# Altium PCB PCB1.PcbDoc (part 1 of 4)
Units mil, origin at the board's own origin, x right, y up, seen from the top; angles counter-clockwise.
Board outline 5315 x 3730 mil, 2 copper layers (Top Layer, Bottom Layer); 713 components, 554 nets, 2458 pads, 0 vias.
Unrouted connection lines stored in the file: 1728.
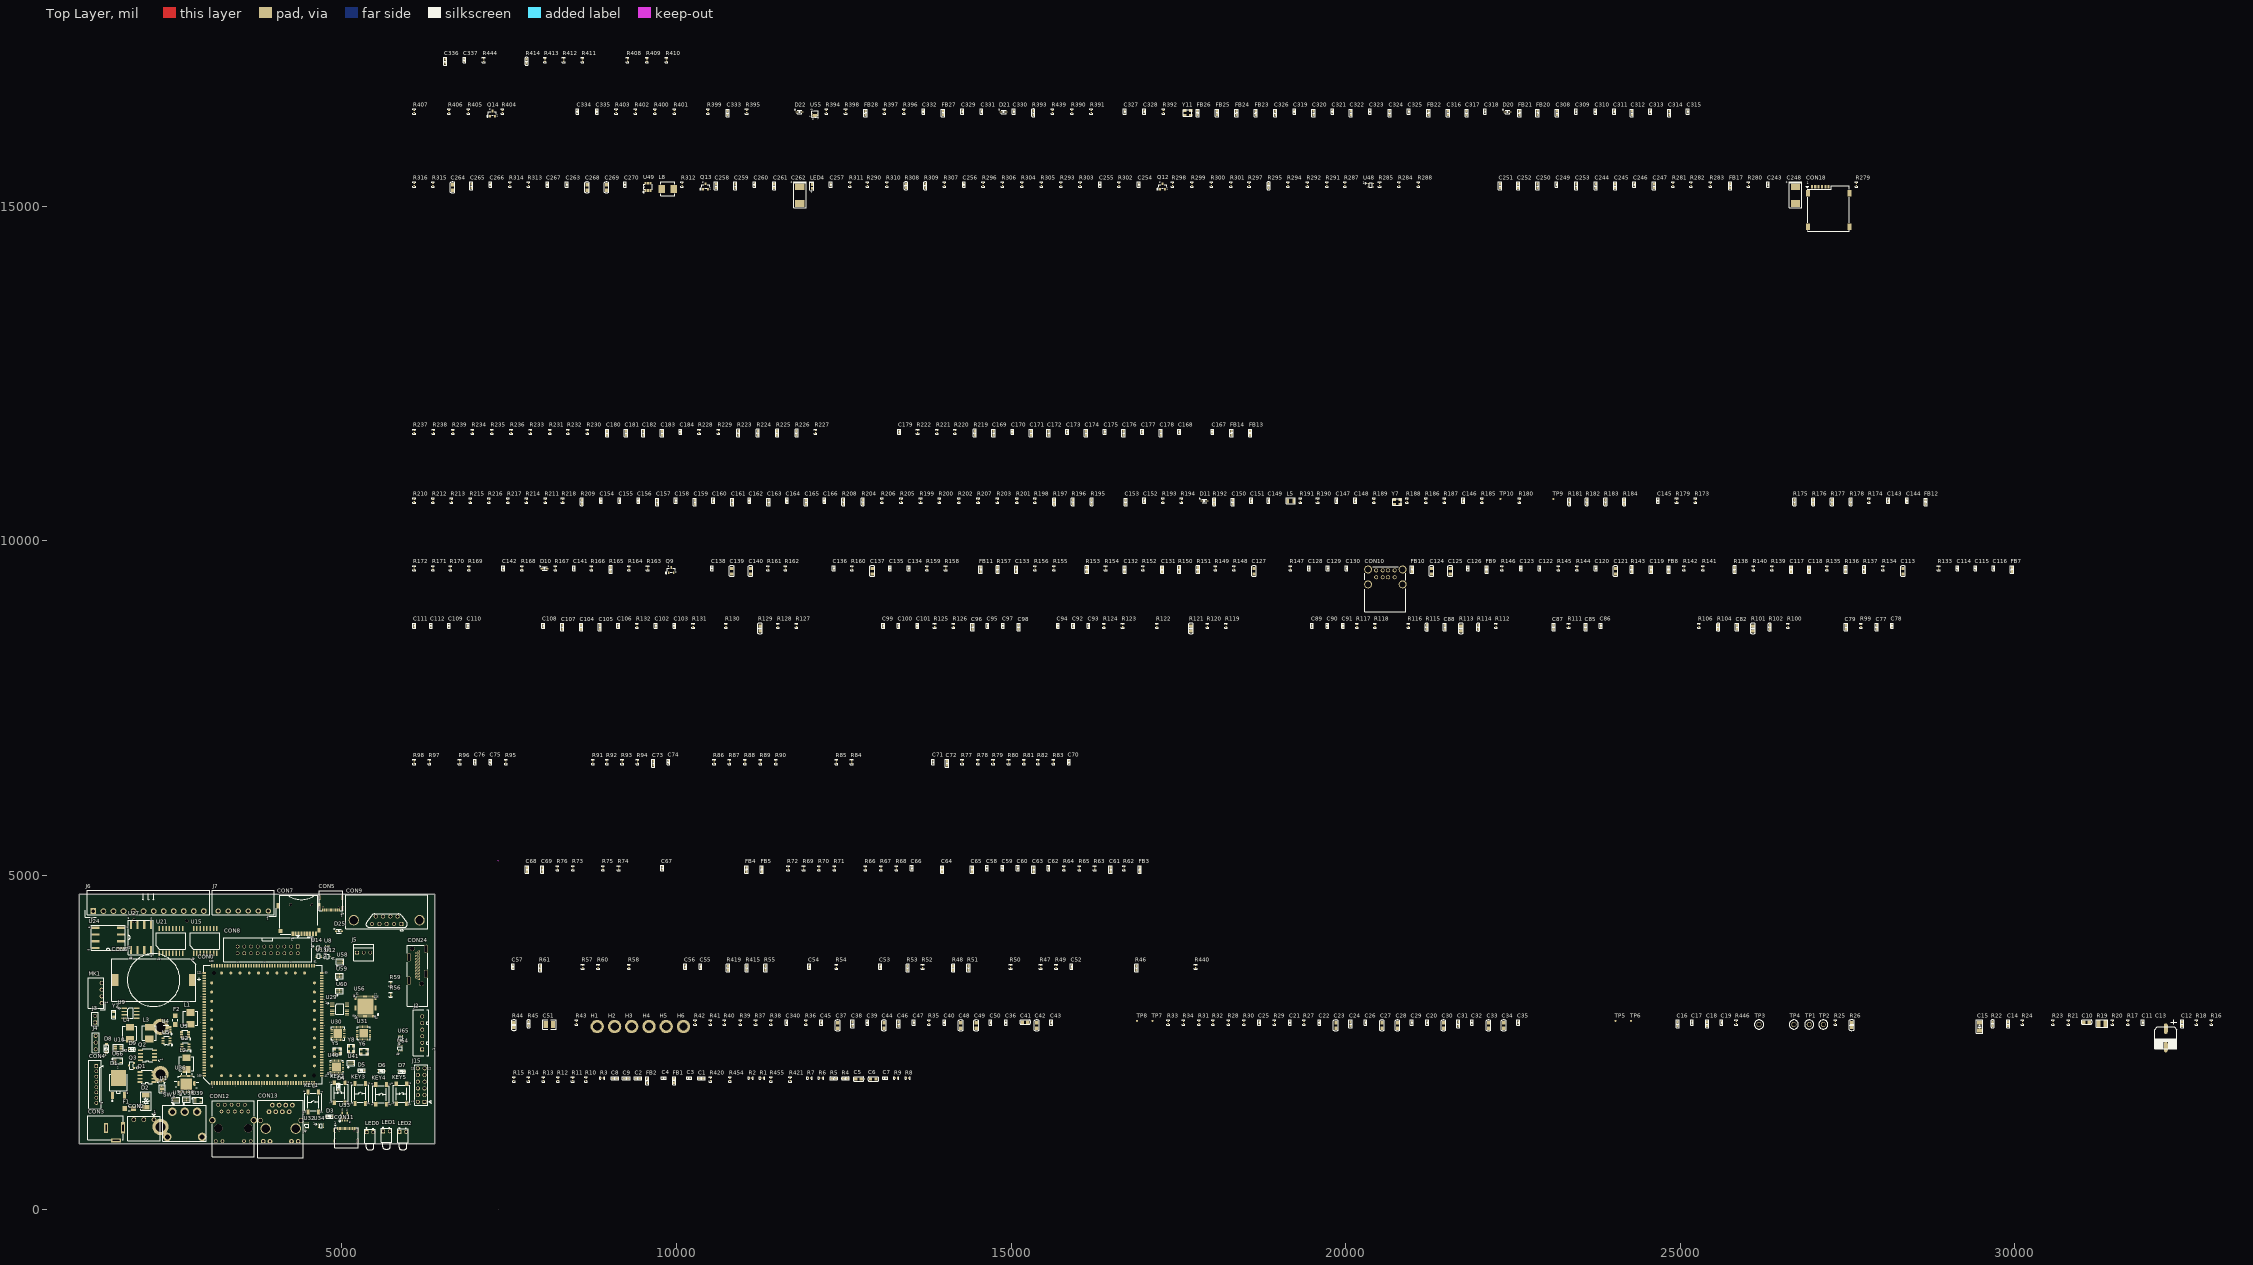
[diagram p0: Top Layer view]
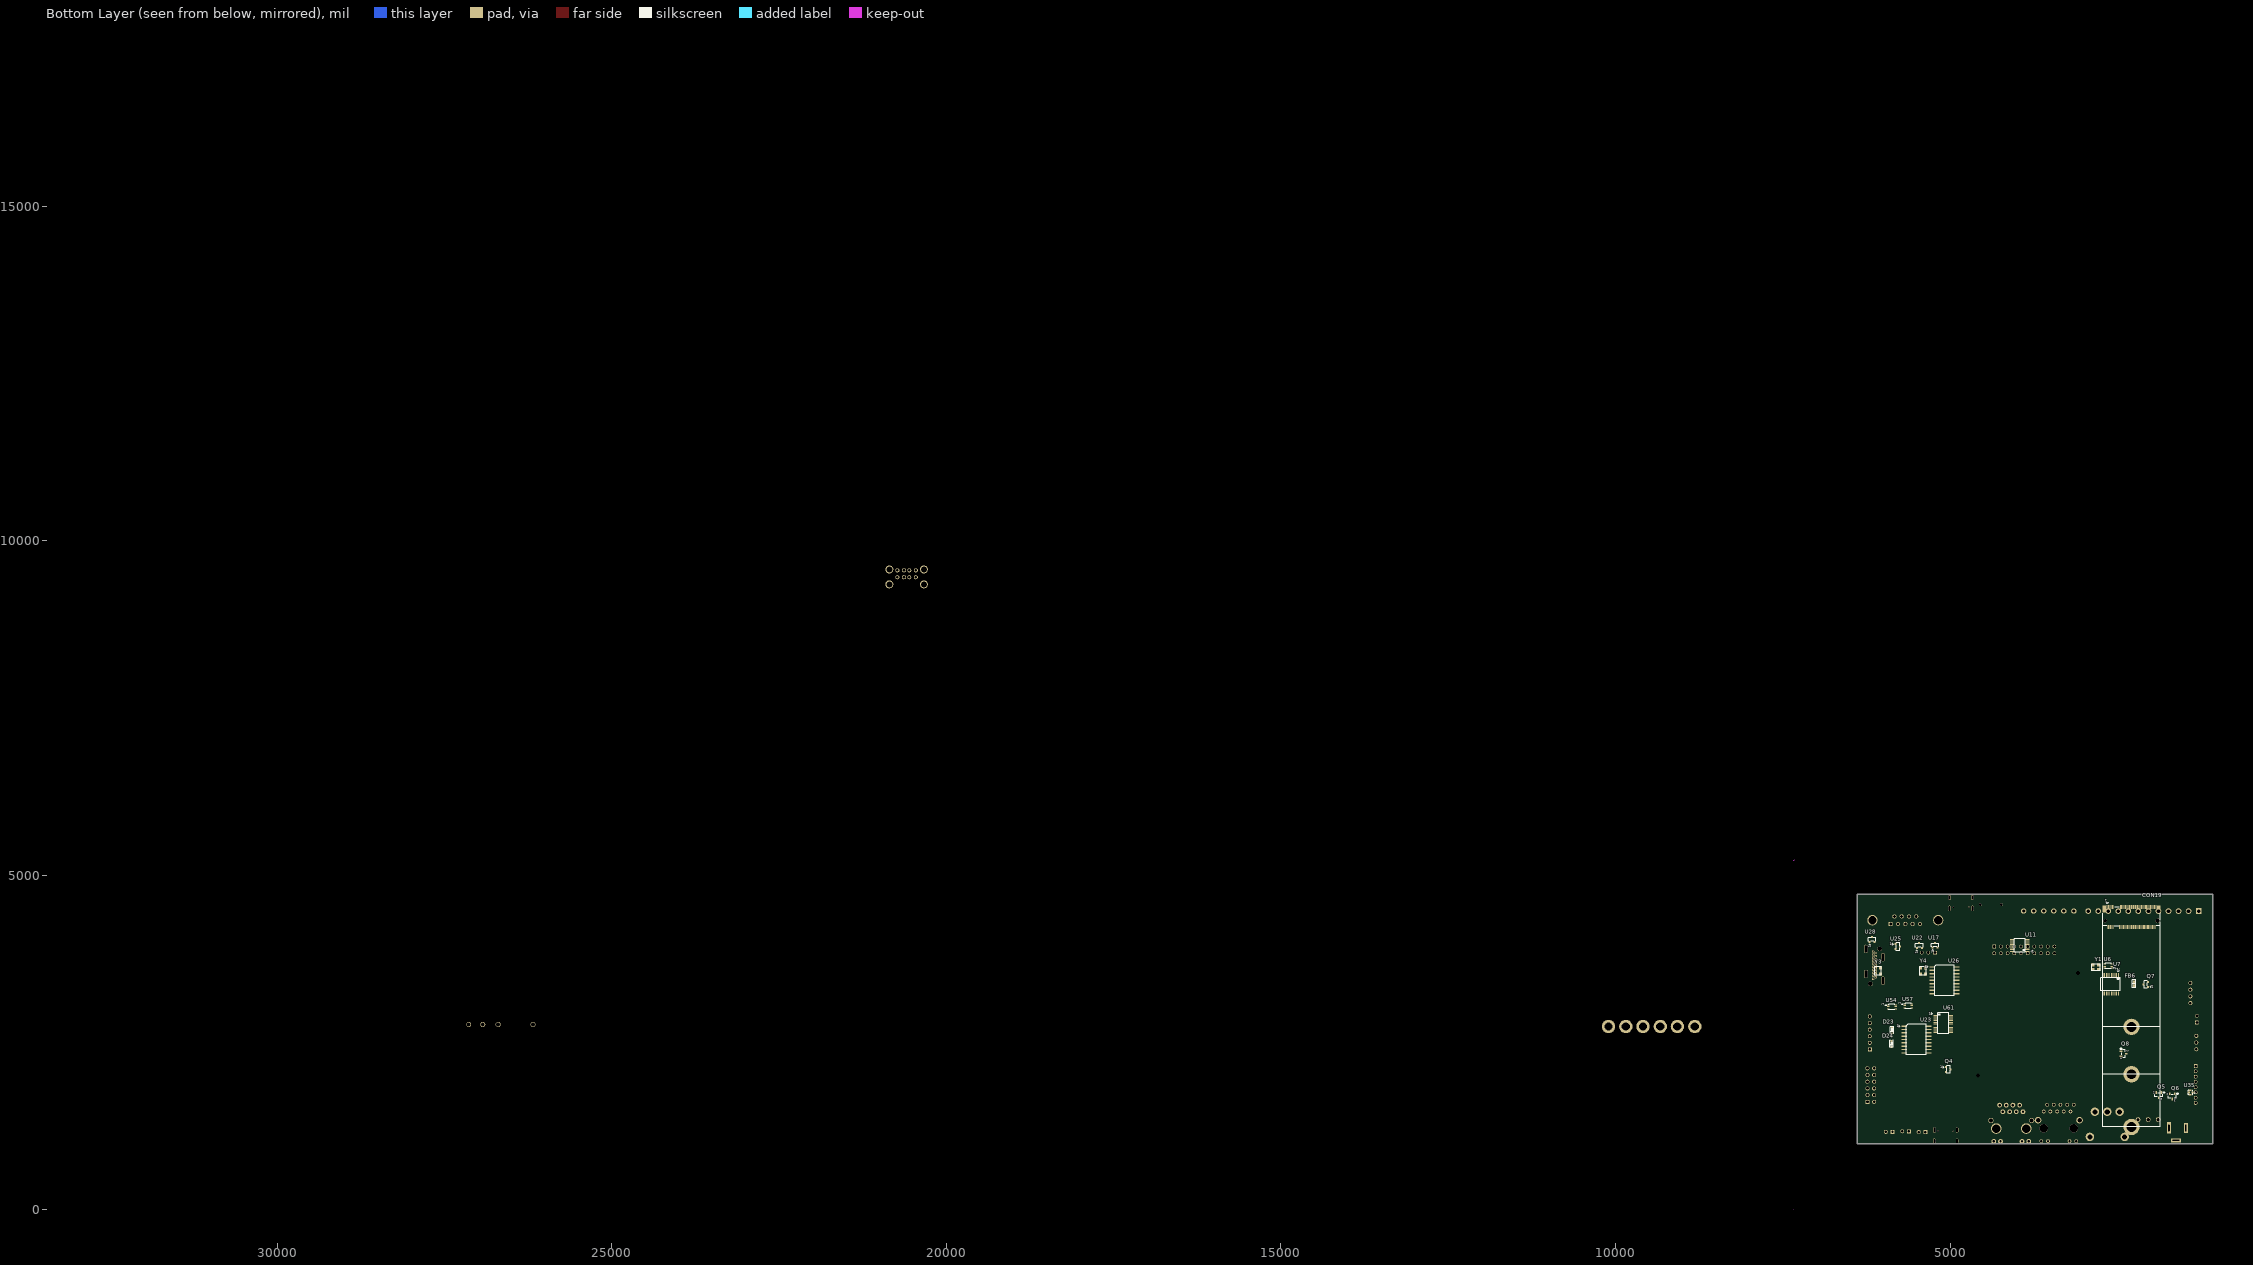
[diagram p1: Bottom Layer view, seen from below]

## Layer stack, top to bottom
Top Solder: solder mask 0.4, Solder Resist, Dk 3.5
Top Layer: signal copper 1.4
Dielectric 1: dielectric 12.6, FR-4, Dk 4.8
Bottom Layer: signal copper 1.4
Bottom Solder: solder mask 0.4, Solder Resist, Dk 3.5

## Board outline
1075,990 6390,990 6390,4720 1075,4720

## Design rules (kind name [scope] priority, off if disabled: settings)
AssemblyTestPointUsage [All] p1 off:
AssemblyTestpoint [All] p1 off: testpointundercomponent=TRUE minsize=40 maxsize=100 preferedsize=60 minholesize=0 maxholesize=40 preferedholesize=32 testpointgrid=1 usegrid=TRUE gridtolerance=0.01 allowsidetop=TRUE allowsidebottom=TRUE
Clearance [All] p1 off: gap=10 ignorepadtopadclearanceinfootprint=FALSE
ComponentClearance [All] p1 off: gap=10 collisioncheckmode=3 verticalgap=10 showdistances=FALSE
DiffPairsRouting [All] p1 off: maxlimit=10 minlimit=10 mostfreqgap=10 toplayer_minwidth=15 toplayer_maxwidth=15 toplayer_prefwidth=15 bottomlayer_minwidth=15 bottomlayer_maxwidth=15 bottomlayer_prefwidth=15 maxuncoupledlength=500
FabricationTestPointUsage [All] p1 off: valid=0 allowmultiple=FALSE
FabricationTestpoint [All] p1 off: side=3 testpointundercomponent=TRUE minsize=40 maxsize=100 preferedsize=60 minholesize=0 maxholesize=40 preferedholesize=32 testpointgrid=1 allowsidetop=TRUE allowsidebottom=TRUE usegrid=TRUE gridtolerance=0.01
FanoutControl Fanout_BGA [IsBGA] p1 off: bgadir=Out bgaviamode=Centered fanoutstyle=Auto fanoutdirection=Alternating viagrid=1 // Fanout_BGA (Default Rule)
FanoutControl Fanout_LCC [IsLCC] p2 off: bgadir=Out bgaviamode=Centered fanoutstyle=Auto fanoutdirection=Alternating viagrid=1 // Fanout_LCC (Default Rule)
FanoutControl Fanout_SOIC [IsSOIC] p3 off: bgadir=Out bgaviamode=Centered fanoutstyle=Auto fanoutdirection=Alternating viagrid=1 // Fanout_SOIC (Default Rule)
FanoutControl Fanout_Small [(CompPinCount < 5)] p4 off: bgadir=Out bgaviamode=Centered fanoutstyle=Auto fanoutdirection=OutThenIn viagrid=1 // Fanout_Small (Default Rule)
FanoutControl Fanout_Default [All] p5 off: bgadir=Out bgaviamode=Centered fanoutstyle=Auto fanoutdirection=Alternating viagrid=1 // Fanout_Default (Default Rule)
Height [All] p1 off: minheight=0 maxheight=1000 prefheight=500
HoleSize [All] p1 off: absolutevalues=TRUE maxlimit=100 minlimit=1 maxpercent=80.000 minpercent=20.000
HoleToHoleClearance [All] p1 off: gap=10 allowstackedmicrovias=TRUE
LayerPairs [All] p1 off: enforce=TRUE
MinimumSolderMaskSliver [All] p1 off: minsoldermaskwidth=10
NetAntennae [All] p1 off: netantennaetolerance=0
PasteMaskExpansion [All] p1 off: expansion=0
PlaneClearance [All] p1 off: clearance=20
PlaneConnect [All] p1 off: planeconnectstyle=Relief reliefexpansion=20 reliefentries=4 reliefconductorwidth=10 reliefairgap=10
PolygonConnect [All] p1 off: connectstyle=Relief reliefconductorwidth=10 reliefentries=4 polygonreliefangle="90 Angle" airgapwidth=10
RoomDefinition "P20_WIFI&BT_SDIO_IO EXPANDERS" [InComponentClass('P20_WIFI&BT_SDIO_IO EXPANDERS')] p1 off: confinementstyle=ConfineIn formatcopy=TRUE lockcomponents=FALSE outline 6050,16615 10065,16615 10065,17335 6050,17335
RoomDefinition "P19_HDMI OUT" [InComponentClass('P19_HDMI OUT')] p2 off: confinementstyle=ConfineIn formatcopy=TRUE lockcomponents=FALSE outline 6050,15525 25330,15525 25330,16565 6050,16565
RoomDefinition P15_4G_5G_NVME [InComponentClass('P15_4G_5G_NVME')] p3 off: confinementstyle=ConfineIn formatcopy=TRUE lockcomponents=FALSE outline 6050,11830 27860,11830 27860,15475 6050,15475
RoomDefinition "P11_ETH1 RMII" [InComponentClass('P11_ETH1 RMII')] p4 off: confinementstyle=ConfineIn formatcopy=TRUE lockcomponents=FALSE outline 6050,10800 19090,10800 19090,11780 6050,11780
RoomDefinition "P10_ETH0 RGMII" [InComponentClass('P10_ETH0 RGMII')] p5 off: confinementstyle=ConfineIn formatcopy=TRUE lockcomponents=FALSE outline 6050,9790 28880,9790 28880,10750 6050,10750
RoomDefinition "P09_USB HOST_USB OTG" [InComponentClass('P09_USB HOST_USB OTG')] p6 off: confinementstyle=ConfineIn formatcopy=TRUE lockcomponents=FALSE outline 6050,8930 30120,8930 30120,9740 6050,9740
RoomDefinition P08_RS485_RS232_CAN [InComponentClass('P08_RS485_RS232_CAN')] p7 off: confinementstyle=ConfineIn formatcopy=TRUE lockcomponents=FALSE outline 6065.5,6924.7 28345.5,6924.7 28345.5,8909.7 6065.5,8909.7
RoomDefinition "P07_MICRO SD_FAN_ARM JTAG" [InComponentClass('P07_MICRO SD_FAN_ARM JTAG')] p8 off: confinementstyle=ConfineIn formatcopy=TRUE lockcomponents=FALSE outline 6032.19,5402.61 16012.19,5402.61 16012.19,6857.61 6032.19,6857.61
RoomDefinition "P06_DEBUG UART_RTC_WD" [InComponentClass('P06_DEBUG UART_RTC_WD')] p9 off: confinementstyle=ConfineIn formatcopy=TRUE lockcomponents=FALSE outline 7556.25,3801.35 18031.25,3801.35 18031.25,5256.35 7556.25,5256.35
RoomDefinition "P05_BOOT SET_KEY_LED_SPI_ADC" [InComponentClass('P05_BOOT SET_KEY_LED_SPI_ADC')] p10 off: confinementstyle=ConfineIn formatcopy=TRUE lockcomponents=FALSE outline 7525,2974.7 17985,2974.7 17985,3784.7 7525,3784.7
RoomDefinition P04_POWER [InComponentClass('P04_POWER')] p11 off: confinementstyle=ConfineIn formatcopy=TRUE lockcomponents=FALSE outline 7524.99,2110 34764.99,2110 34764.99,2950 7524.99,2950
RoomDefinition "P03_SOM CONNECTOR" [InComponentClass('P03_SOM CONNECTOR')] p12 off: confinementstyle=ConfineIn formatcopy=TRUE lockcomponents=FALSE outline 7540,79.7 15550,79.7 15550,2099.7 7540,2099.7
RoutingCorners [All] p1 off: cornerstyle=45-Degree minsetback=100 maxsetback=100
RoutingLayers [All] p1 off: top layer_v5=TRUE bottom layer_v5=TRUE
RoutingPriority [All] p1 off: routingpriority=0
RoutingTopology [All] p1 off: topology=Shortest
RoutingVias [All] p1 off: holewidth=28 width=50 viastyle="Through Hole" minholewidth=28 minwidth=50 maxholewidth=28 maxwidth=50
ShortCircuit [All] p1 off: allowed=FALSE
SilkToSilkClearance [All] p1 off: silktosilkclearance=10
SilkToSolderMaskClearance [IsPad] p1 off: minsilkscreentomaskgap=10 clearancetoexposedcopper=TRUE
SolderMaskExpansion [All] p1 off: expansion=4 istentingtop=FALSE
SupplyNets "Schematic Supply Nets_34" [InNet('VFFE_VIO_1V8')] p1 off: voltage=0.000
SupplyNets "Schematic Supply Nets_33" [InNet('AVDD_3V3_ETH1')] p2 off: voltage=0.000
SupplyNets "Schematic Supply Nets_32" [InNet('VDD_3V3_ACODEC')] p3 off: voltage=0.000
SupplyNets "Schematic Supply Nets_31" [InNet('VDD_3V3_SOM_OUT')] p4 off: voltage=0.000
SupplyNets "Schematic Supply Nets_30" [InNet('VCCA_1V8_SYSCLK')] p5 off: voltage=0.000
SupplyNets "Schematic Supply Nets_29" [InNet('VCCA_1V8_LVDSTX')] p6 off: voltage=0.000
SupplyNets "Schematic Supply Nets_28" [InNet('VDD_1V2_A0L')] p7 off: voltage=0.000
SupplyNets "Schematic Supply Nets_27" [InNet('VDD_1V2_L0L')] p8 off: voltage=0.000
SupplyNets "Schematic Supply Nets_26" [InNet('EGND')] p9 off: voltage=0.000
SupplyNets "Schematic Supply Nets_25" [InNet('VDD_3V3_ETH1')] p10 off: voltage=0.000
SupplyNets "Schematic Supply Nets_24" [InNet('GND')] p11 off: voltage=0.000
SupplyNets "Schematic Supply Nets_23" [InNet('VDD_3V3_JTAG')] p12 off: voltage=0.000
SupplyNets "Schematic Supply Nets_22" [InNet('VDD_1V2_ETH0L')] p13 off: voltage=0.000
SupplyNets "Schematic Supply Nets_21" [InNet('VDD_1V8_SIM')] p14 off: voltage=0.000
SupplyNets "Schematic Supply Nets_20" [InNet('VCCA_1V8_MIPIRX')] p15 off: voltage=0.000
SupplyNets "Schematic Supply Nets_19" [InNet('VDD_3V3_ETH0')] p16 off: voltage=0.000
SupplyNets "Schematic Supply Nets_18" [InNet('VDD_3V3_SOM')] p17 off: voltage=0.000
SupplyNets "Schematic Supply Nets_17" [InNet('VDD_1V8')] p18 off: voltage=0.000
SupplyNets "Schematic Supply Nets_16" [InNet('VDD_5V_HUB')] p19 off: voltage=0.000
SupplyNets "Schematic Supply Nets_15" [InNet('VDD_12V_IN')] p20 off: voltage=0.000
SupplyNets "Schematic Supply Nets_14" [InNet('VCCA_1V8_HDMITX')] p21 off: voltage=0.000
SupplyNets "Schematic Supply Nets_13" [InNet('VDD_3V3_REG0')] p22 off: voltage=0.000
SupplyNets "Schematic Supply Nets_12" [InNet('VDD_12V_MAIN')] p23 off: voltage=0.000
SupplyNets "Schematic Supply Nets_11" [InNet('VDD_3V3_PCIE')] p24 off: voltage=0.000
SupplyNets "Schematic Supply Nets_10" [InNet('VDD_3V3_DRG0')] p25 off: voltage=0.000
SupplyNets "Schematic Supply Nets_9" [InNet('VCCA_1V8_HDMIPLL')] p26 off: voltage=0.000
SupplyNets "Schematic Supply Nets_8" [InNet('VDD_5V_MAIN')] p27 off: voltage=0.000
SupplyNets "Schematic Supply Nets_7" [InNet('GNDI')] p28 off: voltage=0.000
SupplyNets "Schematic Supply Nets_6" [InNet('VDD_3V3_MAIN')] p29 off: voltage=0.000
SupplyNets "Schematic Supply Nets_5" [InNet('VDD_1V8_MAIN')] p30 off: voltage=0.000
SupplyNets "Schematic Supply Nets_4" [InNet('VDD_5V_UART')] p31 off: voltage=0.000
SupplyNets "Schematic Supply Nets_3" [InNet('VDD_5V_HDMICONN')] p32 off: voltage=0.000
SupplyNets "Schematic Supply Nets_2" [InNet('VCCA_1V8_LVDSPLL')] p33 off: voltage=0.000
SupplyNets "Schematic Supply Nets_1" [InNet('VDD_5V_ISO')] p34 off: voltage=0.000
SupplyNets "Schematic Supply Nets" [InNet('VDD_3V3_ETH0A')] p35 off: voltage=0.000
UnRoutedNet [All] p1 off:
UnpouredPolygon [All] p1 off:
Width [All] p1 off: maxlimit=10 minlimit=10 preferedwidth=10
1 further rules are at their usual default settings.

## Classes and differential pairs
component class "P20_WIFI&BT_SDIO_IO EXPANDERS": C336 C337 J15 R408 R409 R410 R411 R412 R413 R414 R444 U61 U64 U65
component class "P19_HDMI OUT": C308 C309 C310 C311 C312 C313 C314 C315 C316 C317 C318 C319 C320 C321 C322 C323 C324 C325 C326 C327 C328 C329 C330 C331 C332 C333 C334 C335 CON24 D20 D21 D22 FB20 FB21 FB22 FB23 FB24 FB25 FB26 FB27 FB28 Q14 R390 R391 R392 R393 R394 R395 R396 R397 R398 R399 R400 R401 R402 R403 R404 R405 R406 R407 R439 U54 U55 U56 U57 U58 U59 U60 Y11
component class P15_4G_5G_NVME: C243 C244 C245 C246 C247 C248 C249 C250 C251 C252 C253 C254 C255 C256 C257 C258 C259 C260 C261 C262 C263 C264 C265 C266 C267 C268 C269 C270 CON18 CON19 FB17 H7 H8 L8 LED4 Q12 Q13 R279 R280 R281 R282 R283 R284 R285 R287 R288 R290 R291 R292 R293 R294 R295 R296 R297 R298 R299 R300 R301 R302 R303 R304 R305 R306 R307 R308 R309 R310 R311 R312 R313 R314 R315 R316 TP16 TP17 U48 U49
component class "P11_ETH1 RMII": C167 C168 C169 C170 C171 C172 C173 C174 C175 C176 C177 C178 C179 C180 C181 C182 C183 C184 CON13 FB13 FB14 R219 R220 R221 R222 R223 R224 R225 R226 R227 R228 R229 R230 R231 R232 R233 R234 R235 R236 R237 R238 R239 U40 U41 Y8
component class "P10_ETH0 RGMII": C143 C144 C145 C146 C147 C148 C149 C150 C151 C152 C153 C154 C155 C156 C157 C158 C159 C160 C161 C162 C163 C164 C165 C166 CON12 D11 FB12 L5 R173 R174 R175 R176 R177 R178 R179 R180 R181 R182 R183 R184 R185 R186 R187 R188 R189 R190 R191 R192 R193 R194 R195 R196 R197 R198 R199 R200 R201 R202 R203 R204 R205 R206 R207 R208 R209 R210 R211 R212 R213 R214 R215 R216 R217 R218 TP9 TP10 U36 U37 U38 U39 Y7
component class "P09_USB HOST_USB OTG": C113 C114 C115 C116 C117 C118 C119 C120 C121 C122 C123 C124 C125 C126 C127 C128 C129 C130 C131 C132 C133 C134 C135 C136 C137 C138 C139 C140 C141 C142 CON10 CON11 D10 FB7 FB8 FB9 FB10 FB11 Q9 R133 R134 R135 R136 R137 R138 R139 R140 R141 R142 R143 R144 R145 R146 R147 R148 R149 R150 R151 R152 R153 R154 R155 R156 R157 R158 R159 R160 R161 R162 R163 R164 R165 R166 R167 R168 R169 R170 R171 R172 U30 U31 U32 U33 U34 U35 Y5 Y6
component class P08_RS485_RS232_CAN: C77 C78 C79 C82 C85 C86 C87 C88 C89 C90 C91 C92 C93 C94 C95 C96 C97 C98 C99 C100 C101 C102 C103 C104 C105 C106 C107 C108 C109 C110 C111 C112 CON9 J6 J7 MK1 R99 R100 R101 R102 R104 R106 R111 R112 R113 R114 R115 R116 R117 R118 R119 R120 R121 R122 R123 R124 R125 R126 R127 R128 R129 R130 R131 R132 U15 U17 U21 U22 U23 U24 U25 U26 U27 U28 U29 Y3 Y4
component class "P07_MICRO SD_FAN_ARM JTAG": C70 C71 C72 C73 C74 C75 C76 CON7 CON8 D25 FB6 J5 Q7 Q8 R77 R78 R79 R80 R81 R82 R83 R84 R85 R86 R87 R88 R89 R90 R91 R92 R93 R94 R95 R96 R97 R98 U11 U12 U13 U14
component class "P06_DEBUG UART_RTC_WD": C58 C59 C60 C61 C62 C63 C64 C65 C66 C67 C68 C69 CON5 CON6 D8 D9 FB3 FB4 FB5 J3 J4 R62 R63 R64 R65 R66 R67 R68 R69 R70 R71 R72 R73 R74 R75 R76 U6 U7 U8 U9 U10 Y1 Y2
component class "P05_BOOT SET_KEY_LED_SPI_ADC": C52 C53 C54 C55 C56 C57 D3 D4 D5 D6 D7 J2 KEY1 KEY2 KEY3 KEY4 KEY5 LED1 LED2 Q5 Q6 R46 R47 R48 R49 R50 R51 R52 R53 R54 R55 R56 R57 R58 R59 R60 R61 R415 R419 R440 U66
component class P04_POWER: C10 C11 C12 C13 C14 C15 C16 C17 C18 C19 C20 C21 C22 C23 C24 C25 C26 C27 C28 C29 C30 C31 C32 C33 C34 C35 C36 C37 C38 C39 C40 C41 C42 C43 C44 C45 C46 C47 C48 C49 C50 C51 C340 CON2 CON3 CON4 D1 D2 D23 D24 F1 F2 H1 H2 H3 H4 H5 H6 L1 L2 L3 L4 LED0 Q1 Q2 Q3 Q4 R16 R17 R18 R19 R20 R21 R22 R23 R24 R25 R26 R27 R28 R29 R30 R31 R32 R33 R34 R35 R36 R37 R38 R39 R40 R41 R42 R43 R44 R45 R446 SW1 TP1 TP2 TP3 TP4 TP5 TP6 TP7 TP8 U1 U2 U3 U4 U5
component class "P03_SOM CONNECTOR": C1 C2 C3 C4 C5 C6 C7 C8 C9 CON0 FB1 FB2 R1 R2 R3 R4 R5 R6 R7 R8 R9 R10 R11 R12 R13 R14 R15 R420 R421 R454 R455

## Components (designator, comment, footprint, x,y, rotation, side; value= is the part's Value field where it differs from the comment)
C1 "680pF_50V" C0603 10375,1964.7 r0 top
C2 "680pF_50V" C0603 9425,1964.7 r0 top
C3 "100nF_25V" C0402 10190,1969.7 r0 top
C4 "100nF_25V" C0402 9810,1969.7 r0 top
C5 "22uF_25V" C0805 12720,1954.7 r0 top
C6 "22uF_25V" C0805 12940,1954.7 r0 top
C7 "100nF_25V" C0402 13120,1969.7 r0 top
C8 "33pF_50V" C0603 9080,1964.7 r0 top
C9 "33pF_50V" C0603 9250,1964.7 r0 top
C10 "22uF_25V" C0805 31074.99,2805 r0 top
C11 "100nF_25V" C0402 31914.99,2800 r90 top
C12 "1uF_25V" C0603 32504.99,2780 r90 top
C13 "220uF_35V" cap_alu_smd_8x10d5 32304.99,2570 r0 top
C14 "22pF_50V" C0603 29904.99,2780 r90 top
C15 "2.2uF_25V" C1206 29474.99,2740 r90 top
C16 "10uF_25V" C0603 24964.99,2780 r90 top
C17 "100nF_25V" C0402 25179.99,2800 r90 top
C18 "10uF_25V" C0603 25404.99,2780 r90 top
C19 "100nF_25V" C0402 25619.99,2800 r90 top
C20 "100nF_25V" C0402 21219.99,2800 r90 top
C21 "100nF_25V" C0402 19169.99,2800 r90 top
C22 "15pF_50V" C0402 19609.99,2800 r90 top
C23 "22uF_25V" C0805 19854.99,2755 r90 top
C24 "1uF_25V" C0603 20074.99,2780 r90 top
C25 "15pF_50V" C0402 18709.99,2800 r90 top
C26 "100nF_25V" C0402 20299.99,2800 r90 top
C27 "22uF_25V" C0805 20544.99,2755 r90 top
C28 "22uF_25V" C0805 20774.99,2755 r90 top
C29 "100nF_25V" C0402 20989.99,2800 r90 top
C30 "22uF_25V" C0805 21464.99,2755 r90 top
C31 "1uF_25V" C0603 21684.99,2780 r90 top
C32 "100nF_25V" C0402 21889.99,2800 r90 top
C33 "22uF_25V" C0805 22134.99,2755 r90 top
C34 "22uF_25V" C0805 22364.99,2755 r90 top
C35 "100nF_25V" C0402 22579.99,2800 r90 top
C36 "100nF_25V" C0402 14924.99,2800 r90 top
C37 "22uF_25V" C0805 12409.99,2755 r90 top
C38 "1uF_25V" C0603 12629.99,2780 r90 top
C39 "100nF_25V" C0402 12854.99,2800 r90 top
C40 "15pF_50V" C0402 14004.99,2800 r90 top
C41 "22uF_25V" C0805 15209.99,2805 r0 top
C42 "22uF_25V" C0805 15384.99,2755 r90 top
C43 "100nF_25V" C0402 15599.99,2800 r90 top
C44 "22uF_25V" C0805 13099.99,2755 r90 top
C45 "100nF_25V" C0402 12164.99,2800 r90 top
C46 "1uF_25V" C0603 13319.99,2780 r90 top
C47 "100nF_25V" C0402 13544.99,2800 r90 top
C48 "22uF_25V" C0805 14249.99,2755 r90 top
C49 "22uF_25V" C0805 14479.99,2755 r90 top
C50 "100nF_25V" C0402 14694.99,2800 r90 top
C51 "1nF_2KV" C1210 8099.99,2770 r0 top
C52 "10nF_50V" C0402 15905,3634.7 r90 top
C53 "10nF_50V" C0402 13045,3634.7 r90 top
C54 "10nF_50V" C0402 11985,3634.7 r90 top
C55 "10nF_50V" C0402 10360,3634.7 r90 top
C56 "100nF_25V" C0402 10130,3634.7 r90 top
C57 "10nF_50V" C0402 7555,3634.7 r90 top
C58 "100nF_25V" C0402 14641.25,5106.35 r90 top
C59 "100nF_25V" C0402 14871.25,5106.35 r90 top
C60 "10nF_50V" C0402 15101.25,5106.35 r90 top
C61 "10uF_25V" C0603 16486.25,5086.35 r90 top
C62 "100nF_25V" C0402 15561.25,5106.35 r90 top
C63 "10uF_25V" C0603 15336.25,5086.35 r90 top
C64 "22pF_50V" C0603 13971.25,5086.35 r90 top
C65 "22pF_50V" C0603 14416.25,5086.35 r90 top
C66 "100nF_25V" C0402 13516.25,5106.35 r90 top
C67 "100nF_25V" C0402 9786.25,5106.35 r90 top
C68 "DNP_18pF_50V" C0603 7766.25,5086.35 r90 top
C69 "DNP_18pF_50V" C0603 7996.25,5086.35 r90 top
C70 "100nF_25V" C0402 15865,6695 r90 top
C71 "100nF_25V" C0402 13835,6695 r90 top
C72 "10uF_25V" C0603 14045,6675 r90 top
C73 "10uF_25V" C0603 9655,6675 r90 top
C74 "100nF_25V" C0402 9880,6695 r90 top
C75 "100nF_25V" C0402 7220,6695 r90 top
C76 "100nF_25V" C0402 6990,6695 r90 top
C77 "10uF_25V" C0603 27940,8710 r90 top
C78 "100nF_25V" C0402 28165,8730 r90 top
C79 "22pF_50V" C0603 27480,8710 r90 top
C82 "22pF_50V" C0603 25850,8710 r90 top
C85 "10uF_25V" C0603 23590,8710 r90 top
C86 "100nF_25V" C0402 23815,8730 r90 top
C87 "22pF_50V" C0603 23110,8710 r90 top
C88 "22pF_50V" C0603 21485,8710 r90 top
C89 "100nF_25V" C0402 19500,8730 r90 top
C90 "100nF_25V" C0402 19730,8730 r90 top
C91 "100nF_25V" C0402 19960,8730 r90 top
C92 "15pF_50V" C0402 15930,8730 r90 top
C93 "15pF_50V" C0402 16160,8730 r90 top
C94 "100nF_25V" C0402 15700,8730 r90 top
C95 "100nF_25V" C0402 14650,8730 r90 top
C96 "10uF_25V" C0603 14425,8710 r90 top
C97 "100nF_25V" C0402 14880,8730 r90 top
C98 "10uF_25V" C0603 15115,8710 r90 top
C99 "100nF_25V" C0402 13090,8730 r90 top
C100 "100nF_25V" C0402 13320,8730 r90 top
C101 "100nF_25V" C0402 13600,8730 r90 top
C102 "15pF_50V" C0402 9690,8730 r90 top
C103 "15pF_50V" C0402 9970,8730 r90 top
C104 "33pF_50V" C0603 8575,8710 r90 top
C105 "33pF_50V" C0603 8855,8710 r90 top
C106 "100nF_25V" C0402 9130,8730 r90 top
C107 "10uF_25V" C0603 8295,8710 r90 top
C108 "100nF_25V" C0402 8010,8730 r90 top
C109 "100nF_25V" C0402 6600,8730 r90 top
C110 "100nF_25V" C0402 6880,8730 r90 top
C111 "100nF_25V" C0402 6080,8730 r90 top
C112 "100nF_25V" C0402 6330,8730 r90 top
C113 "22uF_25V" C0805 28330,9545 r90 top
C114 "100nF_25V" C0402 29145,9590 r90 top
C115 "100nF_25V" C0402 29415,9590 r90 top
C116 "100nF_25V" C0402 29685,9590 r90 top
C117 "DNP_22pF_50V" C0603 26660,9570 r90 top
C118 "1uF_25V" C0603 26930,9570 r90 top
C119 "DNP_22pF_50V" C0603 24565,9570 r90 top
C120 "DNP_100nF_25V" C0402 23740,9590 r90 top
C121 "DNP_22uF_25V" C0805 24035,9545 r90 top
C122 "DNP_100nF_25V" C0402 22900,9590 r90 top
C123 "DNP_100nF_25V" C0402 22620,9590 r90 top
C124 "22uF_25V" C0805 21285,9545 r90 top
C125 "22uF_25V" C0805 21565,9545 r90 top
C126 "100nF_25V" C0402 21830,9590 r90 top
C127 "22uF_25V" C0805 18630,9545 r90 top
C128 "100nF_25V" C0402 19455,9590 r90 top
C129 "100nF_25V" C0402 19735,9590 r90 top
C130 "100nF_25V" C0402 20015,9590 r90 top
C131 "DNP_22pF_50V" C0603 17260,9570 r90 top
C132 "1uF_25V" C0603 16700,9570 r90 top
C133 "DNP_22pF_50V" C0603 15080,9570 r90 top
C134 "DNP_100nF_25V" C0402 13470,9590 r90 top
C135 "DNP_100nF_25V" C0402 13190,9590 r90 top
C136 "DNP_100nF_25V" C0402 12350,9590 r90 top
C137 "DNP_22uF_25V" C0805 12925,9545 r90 top
C138 "100nF_25V" C0402 10530,9590 r90 top
C139 "22uF_25V" C0805 10825,9545 r90 top
C140 "22uF_25V" C0805 11105,9545 r90 top
C141 "100nF_25V" C0402 8470,9590 r90 top
C142 "100nF_25V" C0402 7410,9590 r90 top
C143 "100nF_25V" C0402 28110,10600 r90 top
C144 "100nF_25V" C0402 28390,10600 r90 top
C145 "100nF_25V" C0402 24670,10600 r90 top
C146 "12pF_50V" C0402 21760,10600 r90 top
C147 "100nF_25V" C0402 19865,10600 r90 top
C148 "100nF_25V" C0402 20145,10600 r90 top
C149 "12pF_50V" C0402 18850,10600 r90 top
C150 "4.7uF_25V" C0603 18315,10580 r90 top
C151 "100nF_25V" C0402 18590,10600 r90 top
C152 "100nF_25V" C0402 16990,10600 r90 top
C153 "DNP_1uF_25V" C0603 16715,10580 r90 top
C154 "100nF_25V" C0402 8870,10600 r90 top
C155 "100nF_25V" C0402 9150,10600 r90 top
C156 "100nF_25V" C0402 9430,10600 r90 top
C157 "1uF_25V" C0603 9715,10580 r90 top
C158 "100nF_25V" C0402 9990,10600 r90 top
C159 "10uF_25V" C0603 10275,10580 r90 top
C160 "100nF_25V" C0402 10550,10600 r90 top
C161 "10uF_25V" C0603 10835,10580 r90 top
C162 "100nF_25V" C0402 11090,10600 r90 top
C163 "10uF_25V" C0603 11375,10580 r90 top
C164 "100nF_25V" C0402 11650,10600 r90 top
C165 "10uF_25V" C0603 11935,10580 r90 top
C166 "100nF_25V" C0402 12210,10600 r90 top
C167 "12pF_50V" C0402 18010,11630 r90 top
C168 "12pF_50V" C0402 17515,11630 r90 top
C169 "10uF_25V" C0603 14740,11610 r90 top
C170 "100nF_25V" C0402 15020,11630 r90 top
C171 "1uF_25V" C0603 15300,11610 r90 top
C172 "10uF_25V" C0603 15560,11610 r90 top
C173 "100nF_25V" C0402 15840,11630 r90 top
C174 "1uF_25V" C0603 16120,11610 r90 top
C175 "100nF_25V" C0402 16400,11630 r90 top
C176 "1uF_25V" C0603 16680,11610 r90 top
C177 "100nF_25V" C0402 16960,11630 r90 top
C178 "1uF_25V" C0603 17240,11610 r90 top
C179 "100nF_25V" C0402 13330,11630 r90 top
C180 "DNP_15pF_50V" C0603 8965,11610 r90 top
C181 "DNP_15pF_50V" C0603 9245,11610 r90 top
C182 "DNP_15pF_50V" C0603 9505,11610 r90 top
C183 "DNP_15pF_50V" C0603 9785,11610 r90 top
C184 "100nF_25V" C0402 10060,11630 r90 top
C243 "100nF_25V" C0402 26315,15325 r90 top
C244 "10pF_50V" C0603 23740,15305 r90 top
C245 "33pF_50V" C0603 24030,15305 r90 top
C246 "100nF_25V" C0402 24315,15325 r90 top
C247 "10uF_25V" C0603 24610,15305 r90 top
C248 "220uF_10V" CAP_CASE_D 26725,15165 r90 top
C249 "10nF_50V" C0402 23155,15325 r90 top
C250 "DNP_33pF_50V" C0603 22870,15305 r90 top
C251 "DNP_33pF_50V" C0603 22310,15305 r90 top
C252 "DNP_33pF_50V" C0603 22580,15305 r90 top
C253 "1uF_25V" C0603 23450,15305 r90 top
C254 "100nF_25V" C0402 16910,15325 r90 top
C255 "100nF_25V" C0402 16330,15325 r90 top
C256 "100nF_25V" C0402 14295,15325 r90 top
C257 "100nF_25V" C0402 12305,15325 r90 top
C258 "10pF_50V" C0603 10590,15305 r90 top
C259 "33pF_50V" C0603 10880,15305 r90 top
C260 "100nF_25V" C0402 11165,15325 r90 top
C261 "10uF_25V" C0603 11460,15305 r90 top
C262 "220uF_10V" CAP_CASE_D 11845,15165 r90 top
C263 "100nF_25V" C0402 8360,15325 r90 top
C264 "22uF_25V" C0805 6655,15280 r90 top
C265 "1uF_25V" C0603 6935,15305 r90 top
C266 "100nF_25V" C0402 7220,15325 r90 top
C267 "15pF_50V" C0402 8070,15325 r90 top
C268 "22uF_25V" C0805 8665,15280 r90 top
C269 "22uF_25V" C0805 8955,15280 r90 top
C270 "100nF_25V" C0402 9230,15325 r90 top
C308 "10uF_25V" C0603 23160,16395 r90 top
C309 "100nF_25V" C0402 23445,16415 r90 top
C310 "100nF_25V" C0402 23735,16415 r90 top
C311 "100nF_25V" C0402 24015,16415 r90 top
C312 "10uF_25V" C0603 24280,16395 r90 top
C313 "100nF_25V" C0402 24555,16415 r90 top
C314 "10uF_25V" C0603 24840,16395 r90 top
C315 "100nF_25V" C0402 25115,16415 r90 top
C316 "10uF_25V" C0603 21530,16395 r90 top
C317 "10uF_25V" C0603 21810,16395 r90 top
C318 "100nF_25V" C0402 22085,16415 r90 top
C319 "100nF_25V" C0402 19235,16415 r90 top
C320 "10uF_25V" C0603 19520,16395 r90 top
C321 "100nF_25V" C0402 19805,16415 r90 top
C322 "10uF_25V" C0603 20080,16395 r90 top
C323 "100nF_25V" C0402 20365,16415 r90 top
C324 "10uF_25V" C0603 20660,16395 r90 top
C325 "100nF_25V" C0402 20945,16415 r90 top
C326 "10uF_25V" C0603 18950,16395 r90 top
C327 "12pF_50V" C0402 16700,16415 r90 top
C328 "12pF_50V" C0402 16990,16415 r90 top
C329 "100nF_25V" C0402 14270,16415 r90 top
C330 "100nF_25V" C0402 15040,16415 r90 top
C331 "100nF_25V" C0402 14560,16415 r90 top
C332 "100nF_25V" C0402 13690,16415 r90 top
C333 "2.2nF_50V" C0603 10765,16395 r90 top
C334 "100nF_25V" C0402 8520,16415 r90 top
C335 "100nF_25V" C0402 8810,16415 r90 top
C336 "10uF_25V" C0603 6545,17165 r90 top
C337 "100nF_25V" C0402 6830,17185 r90 top
C340 "15pF_50V" C0402 11644.99,2800 r90 top
CON0 "SOM-TL3562_2" SMD_200P_45x45_TL3562 3821.1,2772.28 r0 top
CON2 "CON_3P_3D81_90_MALE" CON_3P_3D81_90_MALE_NEW 2040,1215 r0 top
CON3 "DC-005" con_dc005_new 1474.3,1205.5 r270 top
CON4 "CON_2D0MM_8P" DIP_CON_2D0MM_8P 1308.35,1873.1 r90 top
CON5 "KH-TYPE-C-16P" TYPE-C_16P_90_SMD 4835,4620 r180 top
CON6 "CR2032-BS-6-1" CON_BATTERY_CR2032 2185,3435 r180 top
CON7 "1060802AR013" CON_TF_CARD 4365,4400 r180 top
CON8 "IDC_20P" con_2d54_2x10_th_box 3890,3885 r270 top
CON9 "D-DMR009PM-D002" CON_DB9 5670,4456 r0 top
CON10 "907-111A1012D10200" CON_USBA_DUAL 20595,9290 r0 top
CON11 "KH-TYPE-C-16P" TYPE-C_16P_90_SMD 5066.35,1076.8 r0 top
CON12 "KRJ-320DNL" KRJ-320DNL_14P 3375,1214.1 r0 top
CON13 "KRJ-138EHNL" CON_YDS_13F-64GYD2PLXNL 4085,1210 r180 top
CON18 "SI63C-01200" micro-sim 27220,14970 r0 top
CON19 "APCI0105-P001A" conn-smd_apci0103-p001a 2287.8,2830.4 r0 bottom
CON24 "FHD14-FDB300K6K" DIP_HDMI-A 6128.29,3501.35 r0 top
D1 "MBR1060CD" TO-252 1660,1872 r0 top
D2 "SMBJ16CA" SMB 2070,1625 r270 top
D3 "LC05CI" SOD323_BI 4814.7,1395.1 r180 top
D4 "LC05CI" SOD323_BI 4950.1,1845.3 r90 top
D5 "LC05CI" SOD323_BI 5290,2080 r180 top
D6 "LC05CI" SOD323_BI 5595,2075 r0 top
D7 "LC05CI" SOD323_BI 5895,2070 r0 top
D8 "SD103AW" SOD-123_NEW 1480.5,2410 r90 top
D9 "LC05CI" SOD323_BI 1865,2400 r0 top
D10 "B5819WS-SL" SOD-323 8030,9585 r0 top
D11 "B5819WS-SL" SOD-323 17890,10595 r0 top
D20 "B5819WS-SL" SOD-323 22420,16410 r0 top
D21 "B5819WS-SL" SOD-323 14890,16410 r0 top
D22 "B5819WS-SL" SOD-323 11840,16410 r0 top
D23 "LC05CI" SOD323_BI 5865,2685 r90 bottom
D24 "LC05CI" SOD323_BI 5875,2480 r270 bottom
D25 "B5819WS-SL" SOD-323 4955,4165 r0 top
F1 "FUSE 2A" F1206 1820,1515 r180 top
F2 "FUSE 3A" F1206 2510,2835 r90 top
FB1 "220R_100MHz_2.2A" L0603 9965,1929.7 r90 top
FB2 "220R_100MHz_2.2A" L0603 9565,1929.7 r90 top
FB3 "220R_100MHz_2.2A" L0603 16926.25,5086.35 r90 top
FB4 "220R_100MHz_2.2A" L0603 11046.25,5086.35 r90 top
FB5 "DNP_220R_100MHz_2.2A" L0603 11276.25,5086.35 r90 top
FB6 "220R_100MHz_2.2A" L0603 2249.5,3380 r90 bottom
FB7 "220R_100MHz_2.2A" L0603 29960,9570 r90 top
FB8 "DNP_220R_100MHz_2.2A" L0603 24830,9570 r90 top
FB9 "220R_100MHz_2.2A" L0603 22110,9570 r90 top
FB10 "220R_100MHz_2.2A" L0603 20995,9570 r90 top
FB11 "DNP_220R_100MHz_2.2A" L0603 14545,9570 r90 top
FB12 "220R_100MHz_2.2A" L0603 28670,10580 r90 top
FB13 "220R_100MHz_2.2A" L0603 18575,11610 r90 top
FB14 "220R_100MHz_2.2A" L0603 18295,11610 r90 top
FB17 "DNP_220R_100MHz_2.2A" L0603 25750,15305 r90 top
FB20 "220R_100MHz_2.2A" L0603 22870,16395 r90 top
FB21 "220R_100MHz_2.2A" L0603 22600,16395 r90 top
FB22 "220R_100MHz_2.2A" L0603 21240,16395 r90 top
FB23 "220R_100MHz_2.2A" L0603 18660,16395 r90 top
FB24 "220R_100MHz_2.2A" L0603 18370,16395 r90 top
FB25 "220R_100MHz_2.2A" L0603 18080,16395 r90 top
FB26 "220R_100MHz_2.2A" L0603 17790,16395 r90 top
FB27 "DNP_220R_100MHz_2.2A" L0603 13985,16395 r90 top
FB28 "220R_100MHz_2.2A" L0603 12825,16395 r90 top
H1 "HOLE" MHOLE_C200D125 8814.99,2740 r0 top
H2 "HOLE" MHOLE_C200D125 9074.99,2740 r0 top
H3 "HOLE" MHOLE_C200D125 9329.99,2740 r0 top
H4 "HOLE" MHOLE_C200D125 9589.99,2740 r0 top
H5 "HOLE" MHOLE_C200D125 9844.99,2740 r0 top
H6 "HOLE" MHOLE_C200D125 10104.99,2740 r0 top
J2 "A2501WV-6P" CON_XH_1x6P_2D54_H_M_DIP 6183,2644.4 r90 top
J3 "KH-2.54PH180-1X2P-L11.5" header_1x2p_2d54_male 1310,2850 r90 top
J4 "KH-2.54PH180-1X3P-L11.5" CON3_2D254 1320,2500 r90 top
J5 "FWF25401-S03S22W5B" mol22-23-2031 5325,3848 r0 top
J6 "KF2EDGR-3.81-12P-14" KF2EDGR-3d81-12P 2110,4594.9 r180 top
J7 "KF2EDGR-3.81-06P-14" kf2eg_3_81-6p 3524.9,4570 r180 top
J15 "2.54MM 2x6P TH FEMALE" header_2x6_2d54_male 6185,1865 r90 top
KEY1 "TS-1158B-B-B-W" TS-1158B-B-B-W 4571.7,1611.2 r90 top
KEY2 "TS-1158B-B-B-W" TS-1158B-B-B-W 4965,1750 r90 top
KEY3 "TS-1158B-B-B-W" TS-1158B-B-B-W 5274.1,1738.4 r90 top
KEY4 "TS-1158B-B-B-W" TS-1158B-B-B-W 5585,1725 r90 top
KEY5 "TS-1158B-B-B-W" TS-1158B-B-B-W 5890,1735 r90 top
L1 "CSAB0518-2R2M" SMD_CSAB0518 2735,2861.4 r90 top
L2 "CSAB0518-2R2M" SMD_CSAB0518 2675,2185 r90 top
L3 "CSAB0518-2R2M" SMD_CSAB0518 2120,2641.4 r90 top
L4 "CSAB0518-2R2M" SMD_CSAB0518 1830,2640 r90 top
L5 "CSAB0518-2R2M" SMD-L2520M-2P 19180,10595 r0 top
L8 "CSAB0518-2R2M" SMD_CSAB0518 9870,15260 r0 top
LED0 "RED_LED" CON_2P_3MM 5420,1055 r0 top
LED1 "GREEN_LED" CON_2P_3MM 5665,1065 r0 top
LED2 "GREEN_LED" CON_2P_3MM 5911,1057 r0 top
LED4 "LED_YELLOW GREEN" D0603 12025,15295 r90 top
MK1 "B0505S-1WR3L" DIP4_B0505S_1W 1325,3240 r90 top
Q1 "WPM3021-8/TR" PSOPSOP-8L 2085,1985 r90 top
Q2 "WPM3021-8/TR" PSOPSOP-8L 2095,2310 r90 top
Q3 "CJ3401" SOT23-3 1855,2155 r180 top
Q4 "CJ3401" SOT23-3 5025,2097.5 r180 bottom
Q5 "MMBT3904" SOT23-3_DBZ3 1880,1715 r0 bottom
Q6 "MMBT3904" SOT23-3_DBZ3 1677.4,1695.6 r0 bottom
Q7 "CJ3401" SOT23-3 2075,3370 r0 bottom
Q8 "MMBT3904" SOT23-3_DBZ3 2405.6,2332.6 r270 bottom
Q9 "MMBT3904" SOT23-3_DBZ3 9920,9560 r0 top
Q12 "CJ3400" SOT23-3_DBZ3 17265,15295 r0 top
Q13 "CJ3400" SOT23-3_DBZ3 10435,15295 r0 top
Q14 "MMBT3904" SOT23-3_DBZ3 7250,16385 r0 top
R1 "33R_1%" R0402 11280,1969.7 r0 top
R2 "33R_1%" R0402 11110,1969.7 r0 top
R3 "22R_1%" R0402 8890,1969.7 r0 top
R4 "2.2K_1%" R0603 12525,1964.7 r0 top
R5 "2.2K_1%" R0603 12350,1964.7 r0 top
R6 "DNP_4.7K_1%" R0402 12160,1969.7 r0 top
R7 "DNP_4.7K_1%" R0402 11990,1969.7 r0 top
R8 "2.2R_1%" R0402 13455,1969.7 r0 top
R9 "2.2R_1%" R0402 13285,1969.7 r0 top
R10 "22R_1%" R0402 8650,1949.7 r90 top
R11 "22R_1%" R0402 8450,1949.7 r90 top
R12 "22R_1%" R0402 8230,1949.7 r90 top
R13 "22R_1%" R0402 8010,1949.7 r90 top
R14 "22R_1%" R0402 7790,1949.7 r90 top
R15 "DNP_22R_1%" R0402 7570,1949.7 r90 top
R16 "4.7K_1%" R0402 32939.99,2800 r90 top
R17 "12.4K_1%" R0402 31694.99,2800 r90 top
R18 "4.7K_1%" R0402 32719.99,2800 r90 top
R19 "2R_1%" R1210 31304.99,2785 r0 top
R20 "4.7K_1%" R0402 31464.99,2800 r90 top
R21 "4.7K_1%" R0402 30804.99,2800 r90 top
R22 "1.24K_1%" R0603 29669.99,2780 r90 top
R23 "0R_1%" R0402 30574.99,2800 r90 top
R24 "4.7K_1%" R0402 30119.99,2800 r90 top
R25 "100K_1%" R0402 27319.99,2800 r90 top
R26 "120R_1%" R0805 27564.99,2760 r90 top
R27 "100K_1%" R0402 19379.99,2800 r90 top
R28 "56K_1%" R0402 18249.99,2800 r90 top
R29 "73.2K_1%" R0402 18939.99,2800 r90 top
R30 "10K_1%" R0402 18479.99,2800 r90 top
R31 "12.4K_1%" R0402 17809.99,2800 r90 top
R32 "10K_1%" R0402 18019.99,2800 r90 top
R33 "68K_1%" R0402 17349.99,2800 r90 top
R34 "10K_1%" R0402 17579.99,2800 r90 top
R35 "10K_1%" R0402 13774.99,2800 r90 top
R36 "56K_1%" R0402 11934.99,2800 r90 top
R37 "10K_1%" R0402 11184.99,2800 r90 top
R38 "56K_1%" R0402 11414.99,2800 r90 top
R39 "10K_1%" R0402 10954.99,2800 r90 top
R40 "12.4K_1%" R0402 10719.99,2800 r90 top
R41 "10K_1%" R0402 10509.99,2800 r90 top
R42 "28K_1%" R0402 10279.99,2800 r90 top
R43 "0R_1%" R0402 8504.99,2800 r90 top
R44 "120R_1%" R0805 7569.99,2760 r90 top
R45 "1M_1%" R0603 7789.99,2780 r90 top
R46 "100R_1%" R0603 16875,3614.7 r90 top
R47 "1K_1%" R0402 15445,3634.7 r90 top
R48 "100R_1%" R0603 14135,3614.7 r90 top
R49 "1K_1%" R0402 15675,3634.7 r90 top
R50 "1K_1%" R0402 14995,3634.7 r90 top
R51 "2.2K_1%" R0603 14365,3614.7 r90 top
R52 "1K_1%" R0402 13680,3634.7 r90 top
R53 "2.2K_1%" R0603 13455,3614.7 r90 top
R54 "22R_1%" R0402 12390,3634.7 r90 top
R55 "100R_1%" R0603 11330,3614.7 r90 top
R56 "0R_1%" R0402 5730,3214.7 r90 top
R57 "10K_1%" R0402 8600,3634.7 r90 top
R58 "0R_1%" R0402 9290,3634.7 r90 top
R59 "0R_1%" R0402 5730,3374.7 r90 top
R60 "0R_1%" R0402 8830,3634.7 r90 top
R61 "100R_1%" R0603 7965,3614.7 r90 top
R62 "22R_1%" R0402 16691.25,5106.35 r90 top
R63 "22R_1%" R0402 16251.25,5106.35 r90 top
R64 "5.1k_1%" R0402 15791.25,5106.35 r90 top
R65 "5.1k_1%" R0402 16021.25,5106.35 r90 top
R66 "4.7K_1%" R0402 12826.25,5106.35 r90 top
R67 "4.7K_1%" R0402 13056.25,5106.35 r90 top
R68 "4.7K_1%" R0402 13286.25,5106.35 r90 top
R69 "DNP_4.7K_1%" R0402 11901.25,5106.35 r90 top
R70 "DNP_4.7K_1%" R0402 12131.25,5106.35 r90 top
R71 "DNP_4.7K_1%" R0402 12361.25,5106.35 r90 top
R72 "1K_1%" R0402 11671.25,5106.35 r90 top
R73 "DNP_4.7K_1%" R0402 8451.25,5106.35 r90 top
R74 "DNP_4.7K_1%" R0402 9136.25,5106.35 r90 top
R75 "4.7K_1%" R0402 8901.25,5106.35 r90 top
R76 "0R_1%" R0402 8221.25,5106.35 r90 top
R77 "10K_1%" R0402 14270,6695 r90 top
R78 "DNP_10K_1%" R0402 14505,6695 r90 top
R79 "DNP_10K_1%" R0402 14735,6695 r90 top
R80 "DNP_10K_1%" R0402 14965,6695 r90 top
R81 "DNP_10K_1%" R0402 15195,6695 r90 top
R82 "DNP_10K_1%" R0402 15405,6695 r90 top
R83 "DNP_10K_1%" R0402 15635,6695 r90 top
R84 "1K_1%" R0402 12620,6695 r90 top
R85 "22R_1%" R0402 12390,6695 r90 top
R86 "10K_1%" R0402 10565,6695 r90 top
R87 "10K_1%" R0402 10795,6695 r90 top
R88 "10K_1%" R0402 11025,6695 r90 top
R89 "10K_1%" R0402 11255,6695 r90 top
R90 "10K_1%" R0402 11485,6695 r90 top
R91 "10K_1%" R0402 8750,6695 r90 top
R92 "10K_1%" R0402 8960,6695 r90 top
R93 "10K_1%" R0402 9190,6695 r90 top
R94 "10K_1%" R0402 9420,6695 r90 top
R95 "4.7K_1%" R0402 7450,6695 r90 top
R96 "1K_1%" R0402 6760,6695 r90 top
R97 "10K_1%" R0402 6310,6695 r90 top
R98 "20K_1%" R0402 6080,6695 r90 top
R99 "10K_1%" R0402 27705,8730 r90 top
R100 "1K_1%" R0402 26615,8730 r90 top
R101 "120R_1%" R0805 26090,8690 r90 top
R102 "10R_1%" R0603 26340,8710 r90 top
R104 "10R_1%" R0603 25570,8710 r90 top
R106 "1K_1%" R0402 25285,8730 r90 top
R111 "10K_1%" R0402 23335,8730 r90 top
R112 "1K_1%" R0402 22250,8730 r90 top
R113 "120R_1%" R0805 21725,8690 r90 top
R114 "10R_1%" R0603 21985,8710 r90 top
R115 "10R_1%" R0603 21215,8710 r90 top
R116 "1K_1%" R0402 20940,8730 r90 top
R117 "10K_1%" R0402 20170,8730 r90 top
R118 "10K_1%" R0402 20440,8730 r90 top
R119 "22R_1%" R0402 18215,8730 r90 top
R120 "22R_1%" R0402 17935,8730 r90 top
R121 "120R_1%" R0805 17690,8690 r90 top
R122 "33R_1%" R0402 17180,8730 r90 top
R123 "22R_1%" R0402 16670,8730 r90 top
R124 "22R_1%" R0402 16390,8730 r90 top
R125 "10K_1%" R0402 13860,8730 r90 top
R126 "10K_1%" R0402 14140,8730 r90 top
R127 "22R_1%" R0402 11795,8730 r90 top
R128 "22R_1%" R0402 11515,8730 r90 top
R129 "120R_1%" R0805 11250,8690 r90 top
R130 "33R_1%" R0402 10740,8730 r90 top
R131 "22R_1%" R0402 10250,8730 r90 top
R132 "22R_1%" R0402 9410,8730 r90 top
R133 "0R_1%" R0402 28865,9590 r90 top
R134 "0R_1%" R0402 28035,9590 r90 top
R135 "0R_1%" R0402 27195,9590 r90 top
R136 "DNP_0R_1%" R0603 27475,9570 r90 top
R137 "0R_1%" R0603 27755,9570 r90 top
R138 "1M_1%" R0603 25815,9570 r90 top
R139 "10K_1%" R0402 26375,9590 r90 top
R140 "10K_1%" R0402 26095,9590 r90 top
R141 "10K_1%" R0402 25340,9590 r90 top
R142 "10K_1%" R0402 25060,9590 r90 top
R143 "DNP_680R_1%" R0603 24280,9570 r90 top
R144 "4.7K_1%" R0402 23460,9590 r90 top
R145 "10K_1%" R0402 23180,9590 r90 top
R146 "DNP_4.7K_1%" R0402 22340,9590 r90 top
R147 "0R_1%" R0402 19175,9590 r90 top
R148 "0R_1%" R0402 18335,9590 r90 top
R149 "0R_1%" R0402 18055,9590 r90 top
R150 "DNP_0R_1%" R0603 17515,9570 r90 top
R151 "0R_1%" R0603 17795,9570 r90 top
R152 "10K_1%" R0402 16975,9590 r90 top
R153 "1M_1%" R0603 16135,9570 r90 top
R154 "10K_1%" R0402 16415,9590 r90 top
R155 "10K_1%" R0402 15640,9590 r90 top
R156 "10K_1%" R0402 15360,9590 r90 top
R157 "DNP_680R_1%" R0603 14800,9570 r90 top
R158 "4.7K_1%" R0402 14025,9590 r90 top
R159 "10K_1%" R0402 13745,9590 r90 top
R160 "DNP_4.7K_1%" R0402 12625,9590 r90 top
R161 "10K_1%" R0402 11370,9590 r90 top
R162 "10K_1%" R0402 11630,9590 r90 top
R163 "1K_1%" R0402 9570,9590 r90 top
R164 "51K_1%" R0402 9290,9590 r90 top
R165 "2.2K_1%" R0603 9015,9570 r90 top
R166 "100K_1%" R0402 8730,9590 r90 top
R167 "DNP_15K_1%" R0402 8190,9590 r90 top
R168 "0R_1%" R0402 7690,9590 r90 top
R169 "100K_1%" R0402 6900,9590 r90 top
R170 "0R_1%" R0402 6620,9590 r90 top
R171 "10K_1%" R0402 6360,9590 r90 top
R172 "0R_1%" R0402 6080,9590 r90 top
R173 "4.7K_1%" R0402 25230,10600 r90 top
R174 "DNP_0R_1%" R0402 27825,10600 r90 top
R175 "DNP_37.4R_1%" R0603 26710,10580 r90 top
R176 "DNP_37.4R_1%" R0603 26990,10580 r90 top
R177 "DNP_37.4R_1%" R0603 27270,10580 r90 top
R178 "DNP_37.4R_1%" R0603 27550,10580 r90 top
R179 "4.7K_1%" R0402 24950,10600 r90 top
R180 "330R_1%" R0402 22600,10600 r90 top
R181 "DNP_37.4R_1%" R0603 23345,10580 r90 top
R182 "DNP_37.4R_1%" R0603 23605,10580 r90 top
R183 "DNP_37.4R_1%" R0603 23885,10580 r90 top
R184 "DNP_37.4R_1%" R0603 24165,10580 r90 top
R185 "22R_1%" R0402 22040,10600 r90 top
R186 "330R_1%" R0402 21200,10600 r90 top
R187 "22R_1%" R0402 21480,10600 r90 top
R188 "22R_1%" R0402 20920,10600 r90 top
R189 "22R_1%" R0402 20425,10600 r90 top
R190 "22R_1%" R0402 19585,10600 r90 top
R191 "22R_1%" R0402 19325,10600 r90 top
R192 "2.49K_1%" R0603 18035,10580 r90 top
R193 "10K_1%" R0402 17270,10600 r90 top
R194 "10K_1%" R0402 17550,10600 r90 top
R195 "0R_1%" R0603 16205,10580 r90 top
R196 "0R_1%" R0603 15925,10580 r90 top
R197 "0R_1%" R0603 15645,10580 r90 top
R198 "DNP_4.7K_1%" R0402 15360,10600 r90 top
R199 "DNP_4.7K_1%" R0402 13650,10600 r90 top
R200 "DNP_4.7K_1%" R0402 13930,10600 r90 top
R201 "DNP_4.7K_1%" R0402 15090,10600 r90 top
R202 "DNP_4.7K_1%" R0402 14220,10600 r90 top
R203 "4.7K_1%" R0402 14800,10600 r90 top
R204 "0R_1%" R0603 12785,10580 r90 top
R205 "DNP_4.7K_1%" R0402 13360,10600 r90 top
R206 "DNP_4.7K_1%" R0402 13070,10600 r90 top
R207 "DNP_4.7K_1%" R0402 14510,10600 r90 top
R208 "0R_1%" R0603 12495,10580 r90 top
R209 "0R_1%" R0603 8585,10580 r90 top
R210 "4.7K_1%" R0402 6080,10600 r90 top
R211 "4.7K_1%" R0402 8040,10600 r90 top
R212 "4.7K_1%" R0402 6360,10600 r90 top
R213 "4.7K_1%" R0402 6640,10600 r90 top
R214 "4.7K_1%" R0402 7760,10600 r90 top
R215 "4.7K_1%" R0402 6920,10600 r90 top
R216 "4.7K_1%" R0402 7200,10600 r90 top
R217 "4.7K_1%" R0402 7480,10600 r90 top
R218 "DNP_4.7K_1%" R0402 8300,10600 r90 top
R219 "2.49K_1%" R0603 14460,11610 r90 top
R220 "0R_1%" R0402 14165,11630 r90 top
R221 "5.1k_1%" R0402 13895,11630 r90 top
R222 "4.7K_1%" R0402 13605,11630 r90 top
R223 "DNP_49.9R_1%" R0603 10925,11610 r90 top
R224 "DNP_49.9R_1%" R0603 11215,11610 r90 top
R225 "DNP_49.9R_1%" R0603 11505,11610 r90 top
R226 "DNP_49.9R_1%" R0603 11795,11610 r90 top
R227 "DNP_0R_1%" R0402 12080,11630 r90 top
R228 "DNP_4.7K_1%" R0402 10340,11630 r90 top
R229 "DNP_4.7K_1%" R0402 10630,11630 r90 top
R230 "330R_1%" R0402 8670,11630 r90 top
R231 "4.7K_1%" R0402 8110,11630 r90 top
R232 "4.7K_1%" R0402 8380,11630 r90 top
R233 "330R_1%" R0402 7820,11630 r90 top
R234 "4.7K_1%" R0402 6950,11630 r90 top
R235 "DNP_4.7K_1%" R0402 7240,11630 r90 top
R236 "DNP_4.7K_1%" R0402 7530,11630 r90 top
R237 "DNP_4.7K_1%" R0402 6080,11630 r90 top
R238 "4.7K_1%" R0402 6370,11630 r90 top
R239 "4.7K_1%" R0402 6660,11630 r90 top
R279 "10K_1%" R0402 27635,15325 r90 top
R280 "22R_1%" R0402 26025,15325 r90 top
R281 "DNP_10K_1%" R0402 24895,15325 r90 top
R282 "22R_1%" R0402 25165,15325 r90 top
R283 "22R_1%" R0402 25455,15325 r90 top
R284 "10K_1%" R0402 20800,15325 r90 top
R285 "0R_1%" R0402 20510,15325 r90 top
R287 "10K_1%" R0402 19990,15325 r90 top
R288 "10K_1%" R0402 21090,15325 r90 top
R290 "1K_1%" R0402 12855,15325 r90 top
R291 "0R_1%" R0402 19720,15325 r90 top
R292 "0R_1%" R0402 19430,15325 r90 top
R293 "DNP_0R_1%" R0402 15745,15325 r90 top
R294 "0R_1%" R0402 19140,15325 r90 top
R295 "0R_1%" R0603 18850,15305 r90 top
R296 "10K_1%" R0402 14585,15325 r90 top
R297 "0R_1%" R0402 18560,15325 r90 top
R298 "0R_1%" R0402 17415,15325 r90 top
R299 "DNP_100K_1%" R0402 17705,15325 r90 top
R300 "100K_1%" R0402 17995,15325 r90 top
R301 "100K_1%" R0402 18290,15325 r90 top
R302 "0R_1%" R0402 16615,15325 r90 top
R303 "0R_1%" R0402 16035,15325 r90 top
R304 "0R_1%" R0402 15165,15325 r90 top
R305 "0R_1%" R0402 15455,15325 r90 top
R306 "0R_1%" R0402 14875,15325 r90 top
R307 "10K_1%" R0402 14005,15325 r90 top
R308 "49.9R_1%" R0603 13430,15305 r90 top
R309 "49.9R_1%" R0603 13720,15305 r90 top
R310 "10K_1%" R0402 13145,15325 r90 top
R311 "10K_1%" R0402 12595,15325 r90 top
R312 "10K_1%" R0402 10085,15325 r90 top
R313 "10K_1%" R0402 7790,15325 r90 top
R314 "56K_1%" R0402 7510,15325 r90 top
R315 "12.4K_1%" R0402 6360,15325 r90 top
R316 "10K_1%" R0402 6080,15325 r90 top
R390 "4.7K_1%" R0402 15910,16415 r90 top
R391 "4.7K_1%" R0402 16200,16415 r90 top
R392 "10K_1%" R0402 17280,16415 r90 top
R393 "1M_1%" R0603 15335,16395 r90 top
R394 "10K_1%" R0402 12240,16415 r90 top
R395 "10K_1%" R0402 11050,16415 r90 top
R396 "0R_1%" R0402 13400,16415 r90 top
R397 "0R_1%" R0402 13110,16415 r90 top
R398 "0R_1%" R0402 12530,16415 r90 top
R399 "6.04K_1%" R0402 10470,16415 r90 top
R400 "DNP_4.7K_1%" R0402 9680,16415 r90 top
R401 "DNP_4.7K_1%" R0402 9970,16415 r90 top
R402 "0R_1%" R0402 9390,16415 r90 top
R403 "0R_1%" R0402 9100,16415 r90 top
R404 "100K_1%" R0402 7400,16415 r90 top
R405 "33R_1%" R0402 6890,16415 r90 top
R406 "100K_1%" R0402 6600,16415 r90 top
R407 "100K_1%" R0402 6080,16415 r90 top
R408 "10K_1%" R0402 9270,17185 r90 top
R409 "DNP_10K_1%" R0402 9560,17185 r90 top
R410 "DNP_10K_1%" R0402 9850,17185 r90 top
R411 "22R_1%" R0402 8595,17185 r90 top
R412 "22R_1%" R0402 8315,17185 r90 top
R413 "DNP_10K_1%" R0402 8035,17185 r90 top
R414 "0R_1%" R0603 7760,17165 r90 top
R415 "0R_1%" R0603 11050,3614.7 r90 top
R419 "DNP_0R_1%" R0603 10770,3614.7 r90 top
R420 "33R_1%" R0402 10510,1949.7 r90 top
R421 "33R_1%" R0402 11700,1949.7 r90 top
R439 "0R_1%" R0402 15620,16415 r90 top
R440 "10K_1%" R0402 17760,3634.7 r90 top
R444 "0R_1%" R0402 7120,17185 r90 top
R446 "10K_1%" R0402 25839.99,2800 r90 top
R454 "33R_1%" R0402 10800,1949.7 r90 top
R455 "33R_1%" R0402 11410,1949.7 r90 top
SW1 "SS-12D11L5" sw-126_76 2650,1295.2 r0 top
TP1 "Black Test Point" TP_DIP 26929.99,2770 r0 top
TP2 "Black Test Point" TP_DIP 27139.99,2770 r0 top
TP3 "Black Test Point" TP_DIP 26179.99,2770 r0 top
TP4 "Black Test Point" TP_DIP 26699.99,2770 r0 top
TP5 "SMT TP" TP30 24034.99,2825 r90 top
TP6 "SMT TP" TP30 24264.99,2825 r90 top
TP7 "SMT TP" TP30 17114.99,2825 r90 top
TP8 "SMT TP" TP30 16884.99,2825 r90 top
TP9 "SMT TP" TP30 23105,10625 r90 top
TP10 "SMT TP" TP30 22315,10625 r90 top
U1 "WS3222D-8/TR" DFN2X2-8L 2315,1810 r180 top
U2 "EC2232E" SOT-23-6L 2660,2440 r90 top
U3 "EC2232E" SOT-23-6L 2655,2620 r90 top
U4 "EC2232E" SOT-23-6L 2375,2695 r90 top
U5 "EC2232E" SOT-23-6L 2380,2530 r90 top
U6 "RS0102YVS8" SOP8-20-91 2635,3645 r270 bottom
U7 "CH340T" TSSOP-20 2600,3370 r270 bottom
U8 "LC0504F" SOT363 4778.9,3907.7 r90 top
U9 "DS1307ZM/TR" SOIC8_D8 1840,2940 r0 top
U10 "MAX6369KA+T" sot23_8 1655,2425 r90 top
U11 "RS2233YTSS16" TSSOP16 3958,3952.8 r0 bottom
U12 "LC0504F" SOT363 4785,3785 r180 top
U13 "LC0504F" SOT363 4652.3,3793.3 r180 top
U14 "LC0504F" SOT363 4645,3915 r0 top
U15 "CA-IS3082WX" SOIC16 2955,4020 r90 top
U17 "PESD2CANFD24V-K" SOT23-3 5225,3955 r90 bottom
U21 "CA-IS3082WX" SOIC16 2445,4020 r90 top
U22 "PESD2CANFD24V-K" SOT23-3 5460,3950 r90 bottom
U23 "XL2515" SOIC18 5503.9,2545.01 r180 bottom
U24 "NSI1050-DDBR" SOP8 1506,4065 r180 top
U25 "PESD2CANFD24V-K" SOT23-3 5780,3932.5 r180 bottom
U26 "XL2515" SOIC18 5085,3430 r180 bottom
U27 "NSI1050-DDBR" SOP8 1995,4070 r90 top
U28 "PESD2CANFD24V-K" SOT23-3 6165,4040 r90 bottom
U29 "SIT3232EEUE" TSSOP16_PW16 4965,3000 r0 top
U30 "CH334H" QFN28_5x5 4939.7,2636.1 r0 top
U31 "CH334H" QFN28_5x5 5325,2640.6 r0 top
U32 "LC0504F" SOT363 4475,1260 r90 top
U33 "WS4612EBB-5/TR" SOT23-5 5040,1395 r0 top
U34 "LC0504F" SOT363 4687.7,1255.5 r0 top
U35 "DNP_WUSB3801Q-12/TR" QFN1616-12L 1405,1755 r180 bottom
U36 "YT8521SH-CA" QFN48 2675,1880 r0 top
U37 "PESDALC10N5VU" DFN-10-2510 2520.3,1642.8 r0 top
U38 "PESDALC10N5VU" DFN-10-2510 2675,1647.8 r0 top
U39 "SGM7SZ08YC5G/TR" SC70-5-43M 2847.3,1639.39 r0 top
U40 "YT8512H" QFN32 4920,2135 r0 top
U41 "PESDALC10N5VU" DFN-10-2510 5134.7,2192.8 r0 top
U48 "LC0504F" SOT363 20375,15315 r0 top
U49 "EC2232E" SOT-23-6L 9575,15290 r0 top
U54 "RS0102YVS8" SOP8-20-91 5870,3030 r90 bottom
U55 "DIO1647" WLCSP-36-0d4mm 12070,16380 r0 top
U56 "LT8912B" QFN64_LT8912B 5352,3040.9 r180 top
U57 "DNP_RS0102YVS8" SOP8-20-91 5625,3045 r90 bottom
U58 "PESDALC10N5VU" DFN-10-2510 4970.3,3707.8 r0 top
U59 "PESDALC10N5VU" DFN-10-2510 4964.7,3497.8 r0 top
U60 "PESDALC10N5VU" DFN-10-2510 4964.7,3267.8 r0 top
U61 "XL9555" TSSOP24 5102,2794.6 r180 bottom
U64 "LC0504F" SOT363 5870,2415 r90 top
U65 "LC0504F" SOT363 5878.3,2562.7 r90 top
U66 "RS1G07XC5" SC70-5-43M 1652.3,2229.39 r0 top
Y1 "S3B12.000F1210F30" SMD_3225 2820.31,3624.61 r180 bottom
Y2 "SF20WK32768D31T007" SMD_2012 1589.8,2922.6 r90 top
Y3 "S3B16.000F1210F30" SMD_3225 6075,3570 r90 bottom
Y4 "S3B16.000F1210F30" SMD_3225 5404.59,3569.71 r270 bottom
Y5 "S3B12.000F1210F30" SMD_3225 4930,2370 r0 top
Y6 "S3B12.000F1210F30" SMD_3225 5330.29,2364.61 r0 top
Y7 "S3B25.000F1210F30" SMD_3225 20770,10580 r0 top
Y8 "S3B25.000F1210F30" SMD_3225 5135,2410 r90 top
Y11 "S3B25.000F1210F30" SMD_3225 17640,16395 r0 top

## Footprints (in the part's own frame and the unit in brackets; to place one, negate y for a bottom-side part, rotate by r counter-clockwise, add the part's x,y. Pads: shape width x height; smd on the part's side, far side on the other; paste and mask are expansions set on the pad)
C0402 [mil] "C0402"
  rect 25.2x20.1 smd: 1(20.1,0) 2(-20.1,0)
  silkscreen extent -40,-20 40,20
C0603 [mil] "C0603"
  rect 40.2x29.9 smd: 1(-30,0.5) 2(30,0.5)
  silkscreen extent -58,-24 58,24
C0805 [mil] "C0805"
  rect 48x48 smd: 1(-41.35,0) 2(41.35,0)
  silkscreen extent -79,-35 83,35
C1206 [mil] "C1206"
  rect 59.8x70.1 smd: 1(-60,0) 2(60,0)
  silkscreen extent -102,-45 102,45
C1210 [mil] "C1210"
  rect 63x106.3 smd: 1(-55.1,0) 2(55.1,0)
  silkscreen extent -102,-71 102,71
cap_alu_smd_8x10d5 [mil] "CAP_ALU_SMD_8X10D5"
  oval 59.1x157.5 smd: 1(-46.1,137.8) 2(-46.1,-137.8)
  silkscreen extent -210,-163 117,270
CAP_CASE_D [mil] "CAP_CASE_D"
  rect 100x140 smd: 1(125,0) 2(-125,0)
  silkscreen extent -185,-95 200,95
CON3_2D254 [mil] "CON3_2D254"
  round 60 hole 40: 1(-100,0) 2(0,0) 3(100,0)
  silkscreen extent -150,-75 150,50
con_2d54_2x10_th_box [mil] "CON_2D54_2X10_TH_BOX"
  rect 54x54 / inner round 54 / far side rect 54x54 hole 40: 1(-50,450)
  round 54 hole 40: 2(50,450) 3(-50,350) 4(50,350) 5(-50,250) 6(50,250) 7(-50,150) 8(50,150) 9(-50,50) 10(50,50) 11(-50,-50) 12(50,-50) 13(-50,-150) 14(50,-150) 15(-50,-250) 16(50,-250) 17(-50,-350) 18(50,-350) 19(-50,-450) 20(50,-450)
  silkscreen extent -220,-656 180,680
CON_2P_3MM [mil] "CON_2P_3MM"
  rect 58x58 hole 37: 1(-51,108)
  round 58 hole 37: 2(49,108)
  silkscreen extent -80,-156 78,178
CON_3P_3D81_90_MALE_NEW [mil] "CON_3P_3D81_90_MALE_NEW"
  round 70 hole 50: 1(150,133.9) 2(0,133.9) 3(-150,133.9)
  silkscreen extent -242,-181 242,220
CON_BATTERY_CR2032 [mil] "CON_BATTERY_CR2032"
  rect 102.4x181.1 smd: 1(-576.8,0) 2(576.8,0)
  silkscreen extent -706,-394 629,394
CON_DB9 [mil] "CON_DB9"
  rect 60x60 hole 44: 1(216.5,-183)
  round 60 hole 44: 2(107.5,-183) 3(-1.5,-183) 4(-110.5,-183) 5(-219.5,-183) 6(162,-71) 7(53,-71) 8(-56,-71) 9(-165,-71)
  round 154 hole 124: 10(490.5,-127) 11(-493.5,-127)
  silkscreen extent -610,-283 612,252
con_dc005_new [mil] "CON_DC005_NEW"
  rect 170x60 hole 20 slot 100 at 0 deg: 1(-19.5,255.7)
  rect 150x60 hole 20 slot 100 at 0 deg: 2(-19.5,2.7)
  rect 60x150 hole 20 slot 100 at 90 deg: 3(166.5,151.7)
  silkscreen extent -200,-275 161,255
CON_TF_CARD [mil] "CON_TF_CARD"
  rect 31.5x63 smd: 1(100.4,273.65) 2(57.1,273.65) 3(13.8,273.65) 4(-29.5,273.65) 5(-72.8,273.65) 6(-116.2,273.65) 7(-159.5,273.65) 8(-202.8,273.65) 9(-246.1,273.65)
  rect 47.2x86.6 smd: 10(-293.3,-143.65) 11(316.9,-143.65)
  rect 47.2x70.9 smd: 12(-293.3,222.45)
  rect 63x63 smd: 13(281.5,234.25)
  round 39.4 hole 39.4 unplated: ""(-183.1,-159.45) ""(131.9,-159.45)
  silkscreen extent -270,-305 293,340
CON_USBA_DUAL [mil] "CON_USBA_DUAL"
  round 60 hole 39.4: 1(-137.5,164.5) 2(-39.5,164.5) 3(39.5,164.5) 4(137.5,164.5) 5(-137.5,267.5) 6(-39.5,267.5) 7(39.5,267.5) 8(137.5,267.5)
  round 118.1 hole 90.6: 9(-258.5,57.5) 10(258.5,57.5) 11(258.5,281.5) 12(-258.5,281.5)
  silkscreen extent -305,-348 305,322
CON_XH_1x6P_2D54_H_M_DIP [mil] "CON_XH_1X6P_2D54_H_M_DIP"
  rect 59.8x59.8 / inner round 59.8 / far side rect 59.8x59.8 hole 40.2: 1(-246.5,-17)
  round 59.8 hole 40.2: 2(-148.1,-17) 3(-49.7,-17) 4(48.8,-17) 5(147.2,-17) 6(245.6,-17)
  silkscreen extent -345,-160 344,115
CON_YDS_13F-64GYD2PLXNL [mil] "CON_YDS_13F-64GYD2PLXNL"
  round 71 hole 36: 1(175,-255) 2(125,-355) 3(75,-255) 4(25,-355) 5(-25,-255) 6(-75,-355) 7(-125,-255) 8(-175,-355) 9(260.8,188) 10(160.8,188) 11(-160.8,188) 12(-260.8,188)
  round 157.5 hole 128: 13(-225,-5) 14(225,-5)
  round 78 hole 62: 15(-304.9,-125) 16(304.9,-125)
  silkscreen extent -340,-430 340,430
conn-smd_apci0103-p001a [mil] "CONN-SMD_APCI0103-P001A"
  rect 11.8x61 smd: 1(364.2,-1696.8) 2(354.3,-1399.6) 3(344.5,-1696.8) 4(334.6,-1399.6) 5(324.8,-1696.8) 6(315,-1399.6) 7(305.1,-1696.8) 8(295.3,-1399.6) 9(285.4,-1696.8) 10(275.6,-1399.6) 11(265.8,-1696.8) 20(177.2,-1399.6) 21(167.3,-1696.8) 22(157.5,-1399.6) 23(147.6,-1696.8) 24(137.8,-1399.6) 25(128,-1696.8) 26(118.1,-1399.6) 27(108.3,-1696.8) 28(98.4,-1399.6) 29(88.6,-1696.8) 30(78.7,-1399.6) 31(68.9,-1696.8) 32(59.1,-1399.6) 33(49.2,-1696.8) 34(39.4,-1399.6) 35(29.5,-1696.8) 36(19.7,-1399.6) 37(9.8,-1696.8) 38(0,-1399.6) 39(-9.8,-1696.8) 40(-19.7,-1399.6) 41(-29.5,-1696.8) 42(-39.4,-1399.6) 43(-49.2,-1696.8) 44(-59,-1399.6) 45(-68.9,-1696.8) 46(-78.7,-1399.6) 47(-88.6,-1696.8) 48(-98.4,-1399.6) 49(-108.3,-1696.8) 50(-118.1,-1399.6) 51(-128,-1696.8) 52(-137.8,-1399.6) 53(-147.6,-1696.8) 54(-157.5,-1399.6) 55(-167.3,-1696.8) 56(-177.2,-1399.6) 57(-187,-1696.8) 58(-196.8,-1399.6) 59(-206.7,-1696.8) 60(-216.5,-1399.6) 61(-226.4,-1696.8) 62(-236.2,-1399.6) 63(-246.1,-1696.8) 64(-255.9,-1399.6) 65(-265.8,-1696.8) 66(-275.6,-1399.6) 67(-285.4,-1696.8) 68(-295.3,-1399.6) 69(-305.1,-1696.8) 70(-315,-1399.6) 71(-324.8,-1696.8) 72(-334.6,-1399.6) 73(-344.5,-1696.8) 74(-354.3,-1399.6) 75(-364.2,-1696.8)
  rect 47.2x108.3 smd: 76(-407.5,-1666.3) 77(407.5,-1666.3)
  round 244 hole 149: 78(0,95.5) 79(0,804.2) 80(0,1591.6)
  round 67 hole 67 unplated: ""(-393.7,-1489.2)
  round 48 hole 48 unplated: ""(393.7,-1489.2)
  silkscreen extent -433,-1760 433,1592